# Altium PCB Glucometer-E.C.- Bluetooth Module.PcbDoc
Units mm, origin at the board's own origin, x right, y up, seen from the top; angles counter-clockwise.
Board outline 19.45 x 23.45 mm, 2 copper layers (Top Layer, Bottom Layer); 2 components, 6 nets, 37 pads, 0 vias.
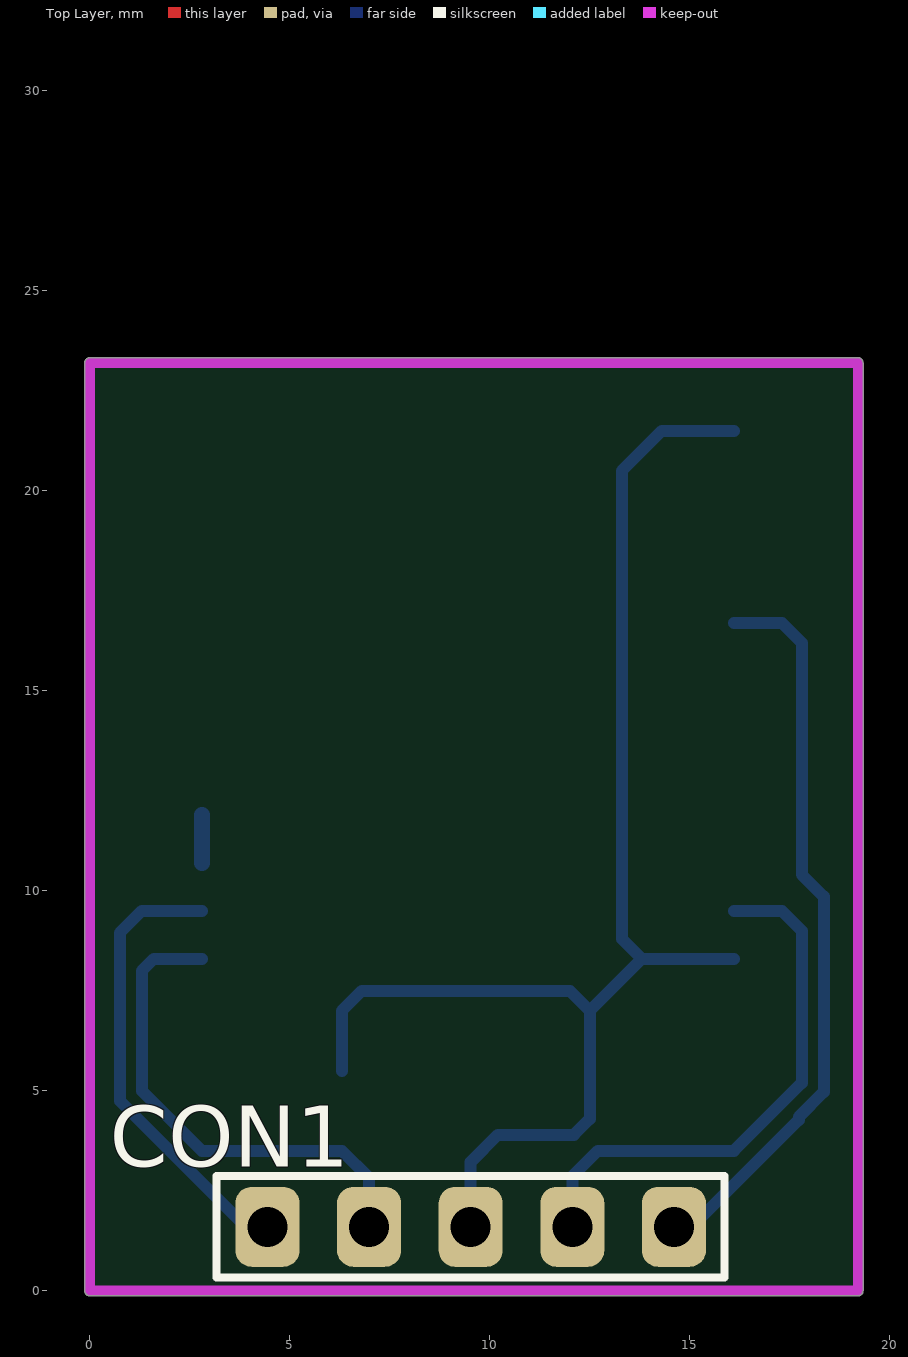
[diagram p0: Top Layer view]
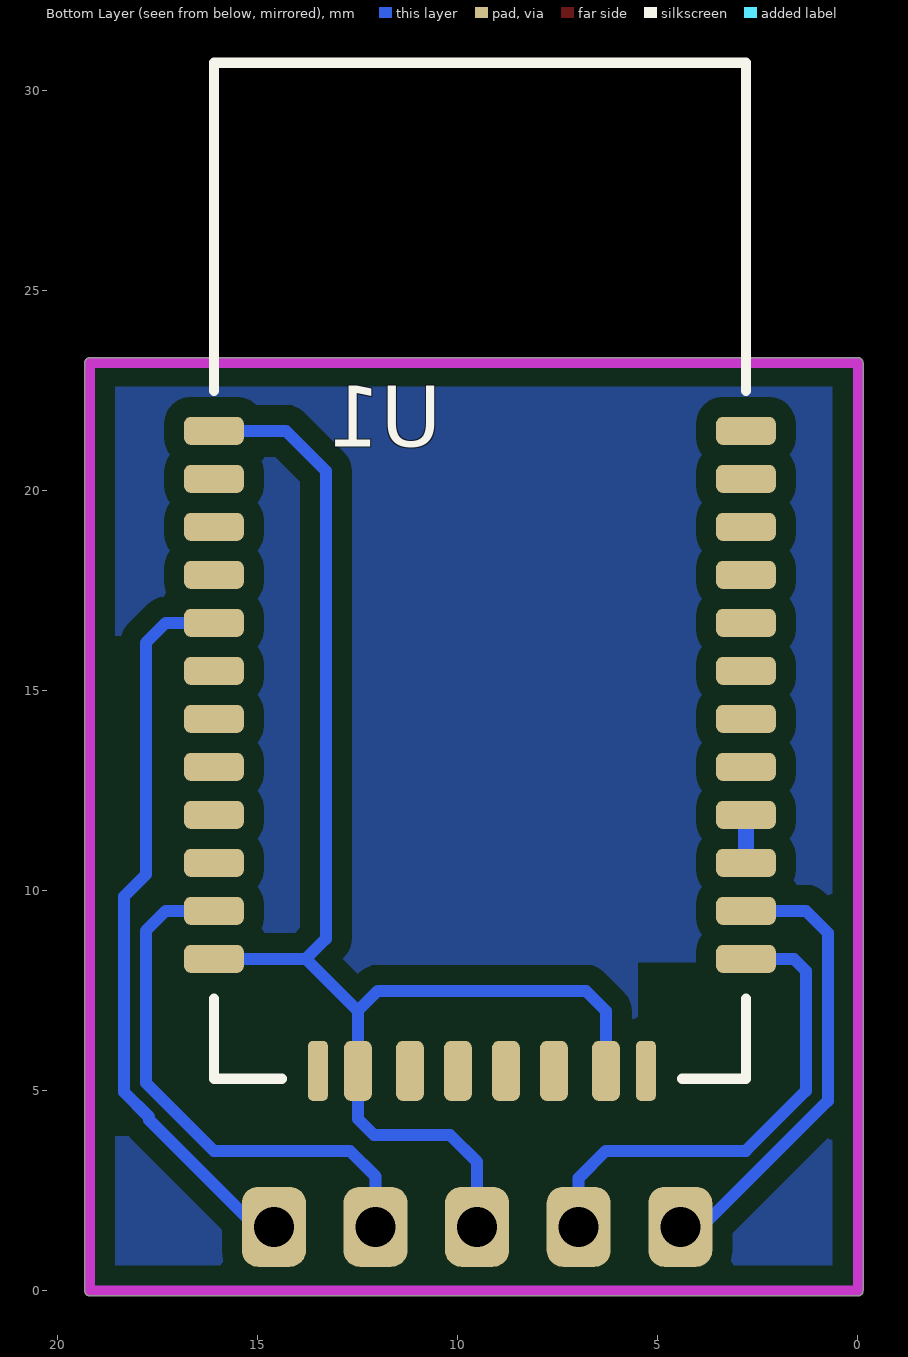
[diagram p1: Bottom Layer view, seen from below]

## Layer stack, top to bottom
Top Layer: signal copper 0.0356
Dielectric: dielectric 0.32, FR-4, Dk 4.8
Bottom Layer: signal copper 0.0356

## Board outline
-0.127,0 ccw(c0,0) 0,-0.127 19.2,-0.127 ccw(c19.2,0) 19.327,0 19.327,23.2 ccw(c19.2,23.2) 19.2,23.327 0,23.327 ccw(c0,23.2) -0.127,23.2

## Design rules (kind name [scope] priority, off if disabled: settings)
Clearance [All] p1: gap=0.25
PolygonConnect [All] p1: connectstyle=Relief reliefconductorwidth=0.254 reliefentries=4 polygonreliefangle="90 Angle" airgapwidth=0.254
RoutingVias [All] p1: holewidth=0.711 width=1.27 viastyle="Through Hole" minholewidth=0.711 minwidth=1.27 maxholewidth=0.711 maxwidth=1.27
SolderMaskExpansion [All] p1: expansion=0.102
Width [All] p1: maxlimit=5 minlimit=0.25 preferedwidth=0.3 minimp=50.000000 maximp=50.000000 favimp=50.000000
28 further rules are at their usual default settings.

## Components (designator, comment, footprint, x,y, rotation, side; value= is the part's Value field where it differs from the comment)
CON1 "Header 5" HDR1X5 14.6,1.6 r180 top
U1 "RN42 Module" RN42-LAND 16.1,5.3 r180 bottom

## Footprints (in the part's own frame and the unit in brackets; to place one, negate y for a bottom-side part, rotate by r counter-clockwise, add the part's x,y. Pads: shape width x height; smd on the part's side, far side on the other; paste and mask are expansions set on the pad)
HDR1X5 [mm] "Connector; Header; 5 Position"
  rrect50% 1.6x2 hole 1: 1(0,0) 2(2.54,0) 3(5.08,0) 4(7.62,0) 5(10.16,0)
  silkscreen extent -1.27,-1.27 11.43,1.27
RN42-LAND [mm] "RN42 Footprint"
  rrect50% 1.5x0.7 smd: 1(0,16.2) 2(0,15) 3(0,13.8) 4(0,12.6) 5(0,11.4) 6(0,10.2) 7(0,9) 8(0,7.8) 9(0,6.6) 10(0,5.4) 11(0,4.2) 12(0,3) 13(13.3,3) 14(13.3,4.2) 15(13.3,5.4) 16(13.3,6.6) 17(13.3,7.8) 18(13.3,9) 19(13.3,10.2) 20(13.3,11.4) 21(13.3,12.6) 22(13.3,13.8) 23(13.3,15) 24(13.3,16.2)
  rrect50% 0.7x1.5 smd: 28(9.8,0.2) 29(3.6,0.2) 31(8.5,0.2) 32(7.3,0.2) 33(6.1,0.2) 34(4.9,0.2)
  rrect50% 0.5x1.5 smd: 30(10.8,0.2) 35(2.6,0.2)
  silkscreen extent 0,0 13.3,25.4

## Part data
CON1: "Header, 5-Pin"
U1: library part RN42MOD

## Nets (pads, with @x,y where several pads share a name; then routed paths per layer and width w, separated by ;. In a path a pad name is that pad's centre, name@x,y a point inside that pad or via, vN(x,y) a via of type N, cw(c..) or ccw(c..) an arc to the next point about the centre after c; other vN are vias at no path point)
GND: CON1.3 U1.1 U1.12 U1.28 U1.29 | length 35.6
  Bottom Layer w0.3: U1.28 6.3,7 6.8,7.5 12,7.5 12.5,7 ; CON1.3 9.52,3.22 10.2,3.9 12.1,3.9 12.5,4.3 U1.29 12.5,7 ; U1.12 13.8,8.3 ; U1.1 14.3,21.5 13.3,20.5 13.3,8.8 13.8,8.3 ; 12.5,7 13.8,8.3
NetCON1_1: CON1.1 U1.5 | length 18.6
  Bottom Layer w0.3: CON1.1@15.049,1.6 17.724,4.276 17.724,4.346 18.35,4.972 18.35,9.854 17.8,10.404 17.8,16.2 17.3,16.7 U1.5
  Bottom Layer w0.4: CON1.1 CON1.1@15.049,1.6
NetCON1_4: CON1.4 U1.13 | length 12.4
  Bottom Layer w0.3: U1.13 1.6,8.3 1.3,8 1.3,5 2.8,3.5 6.3,3.5 6.98,2.82 CON1.4
NetCON1_5: CON1.5 U1.14 | length 11.5
  Bottom Layer w0.3: U1.14 1.3,9.5 0.75,8.95 0.75,4.75 3.9,1.6 CON1.5
NetU1_15: U1.15 U1.16 | length 1.2
  Bottom Layer w0.4: U1.15 U1.16
VCC: CON1.2 U1.11 | length 13.7
  Bottom Layer w0.3: CON1.2 12.06,2.86 12.7,3.5 16.1,3.5 17.8,5.2 17.8,9 17.3,9.5 U1.11
pads on no net: U1.2 U1.3 U1.4 U1.6 U1.7 U1.8 U1.9 U1.10 U1.17 U1.18 U1.19 U1.20 U1.21 U1.22 U1.23 U1.24 U1.30 U1.31 U1.32 U1.33 U1.34 U1.35

## Polygon pours and split planes (outlines as drawn)
no net on Bottom Layer "Bottom Layer-No Net" (solid, pour order 9): 0,22.6 19.2,22.6 19.2,8.209 13.3,8.209 13.3,3.863 19.2,3.863 19.2,0 0,0 0,3.863 5.5,3.863 5.5,8.209 0,8.209

## Keep-outs
Keep-Out Layer:
  lines w0.254: 0,0 0,23.2 19.2,23.2 19.2,0 0,0